# Altium PCB ADD-ON.PcbDoc
Units mil, origin at the board's own origin, x right, y up, seen from the top; angles counter-clockwise.
Board outline 1605 x 1090 mil, 2 copper layers (Top Layer, Bottom Layer); 33 components, 59 nets, 200 pads, 32 vias.
Unrouted connection lines stored in the file: 15.
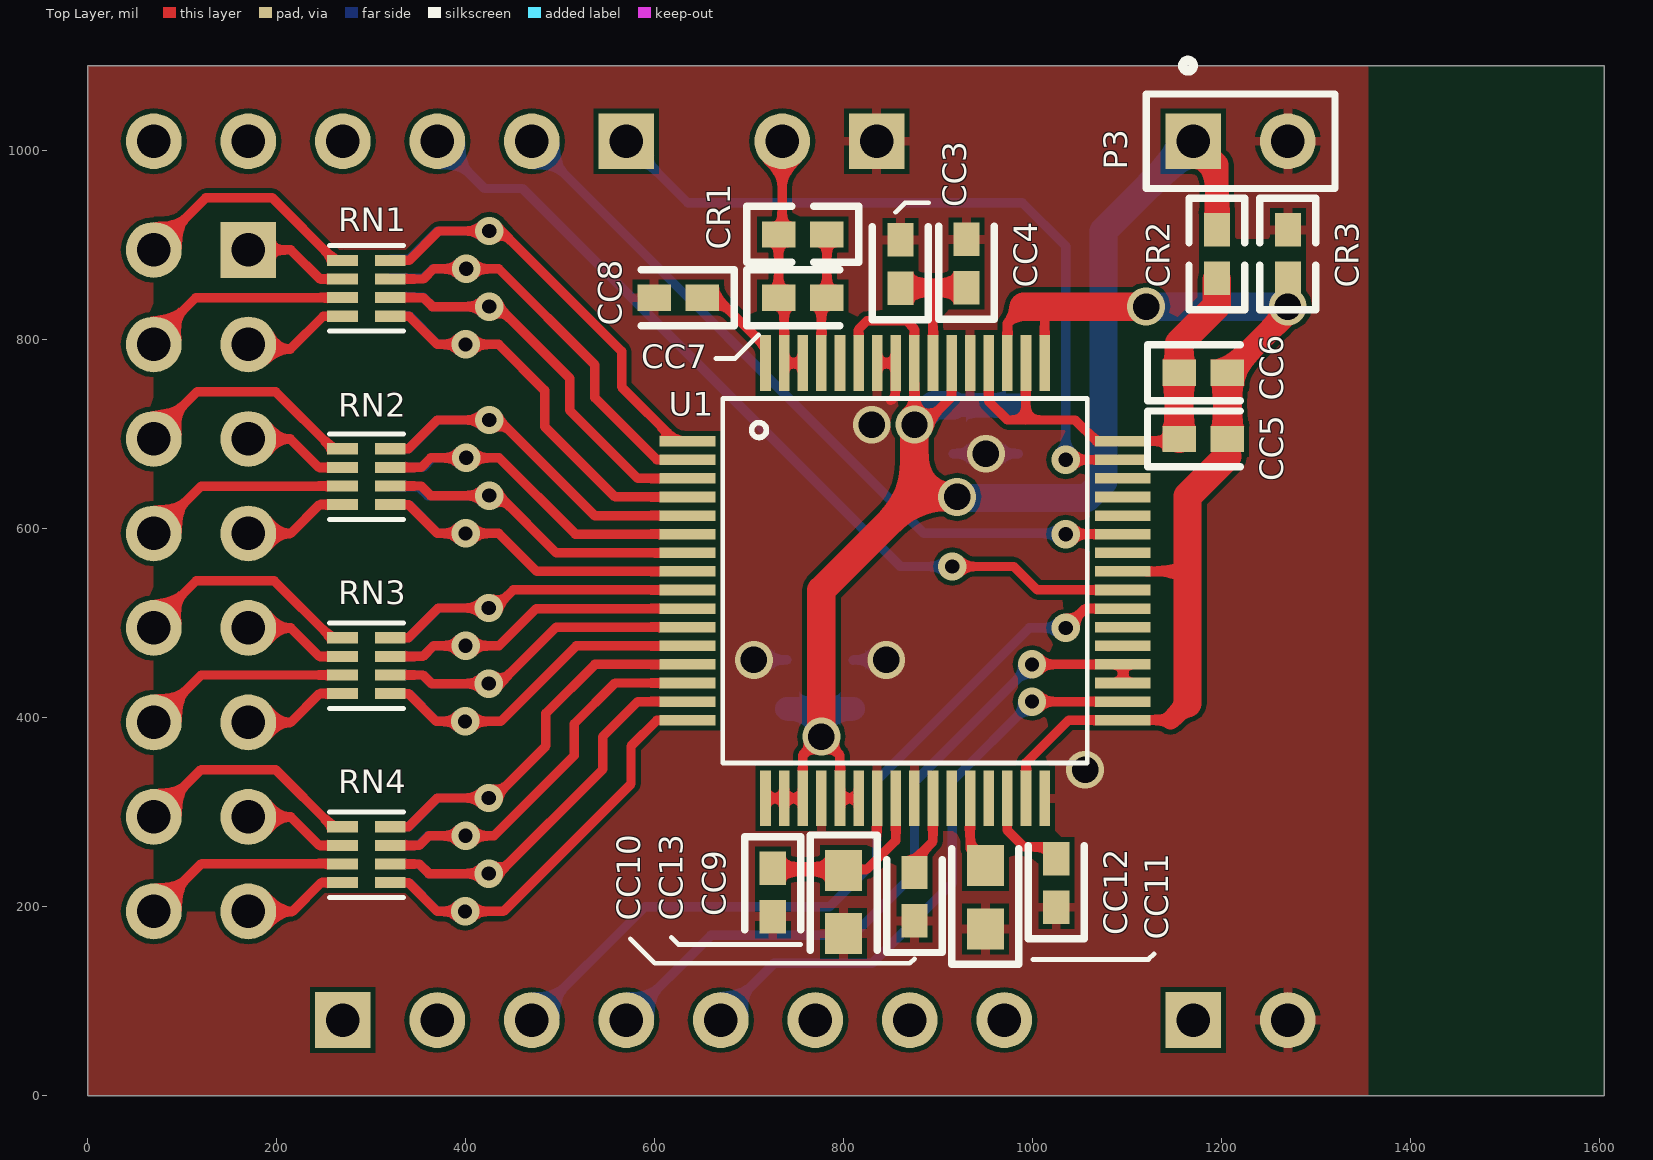
[diagram p0: Top Layer view]
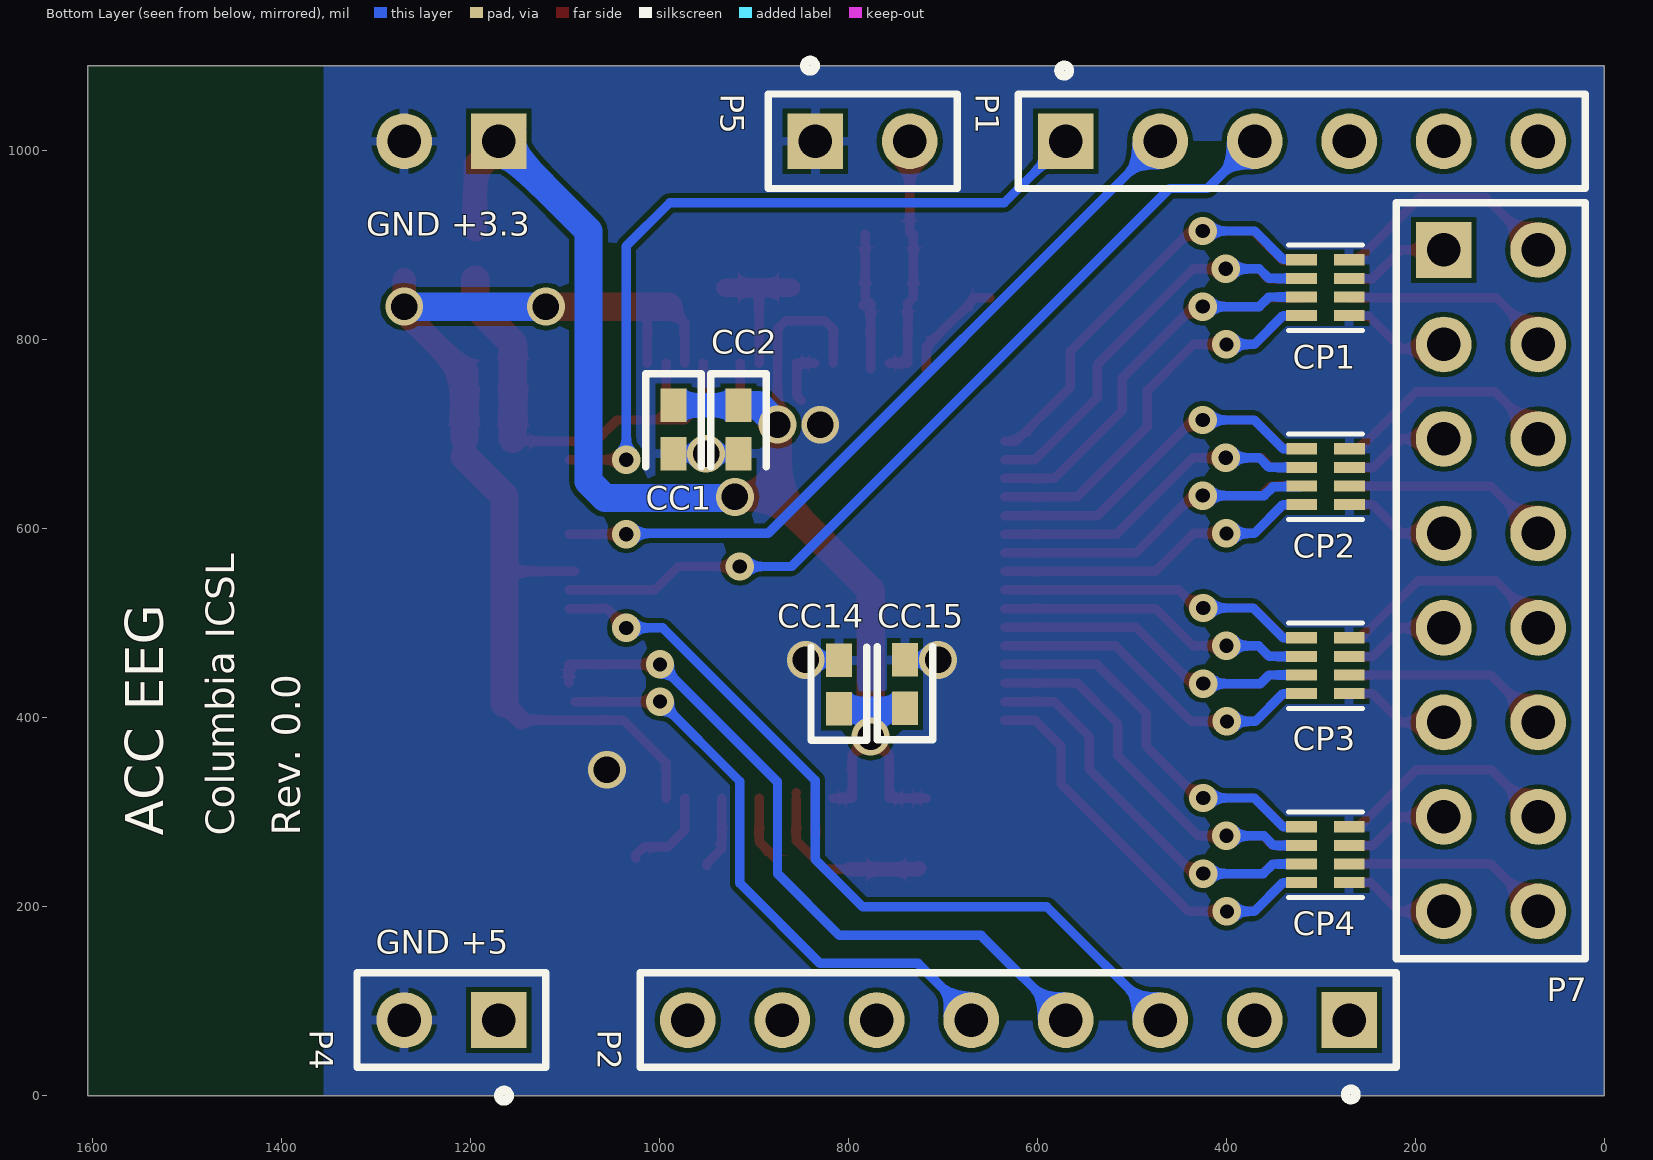
[diagram p1: Bottom Layer view, seen from below]
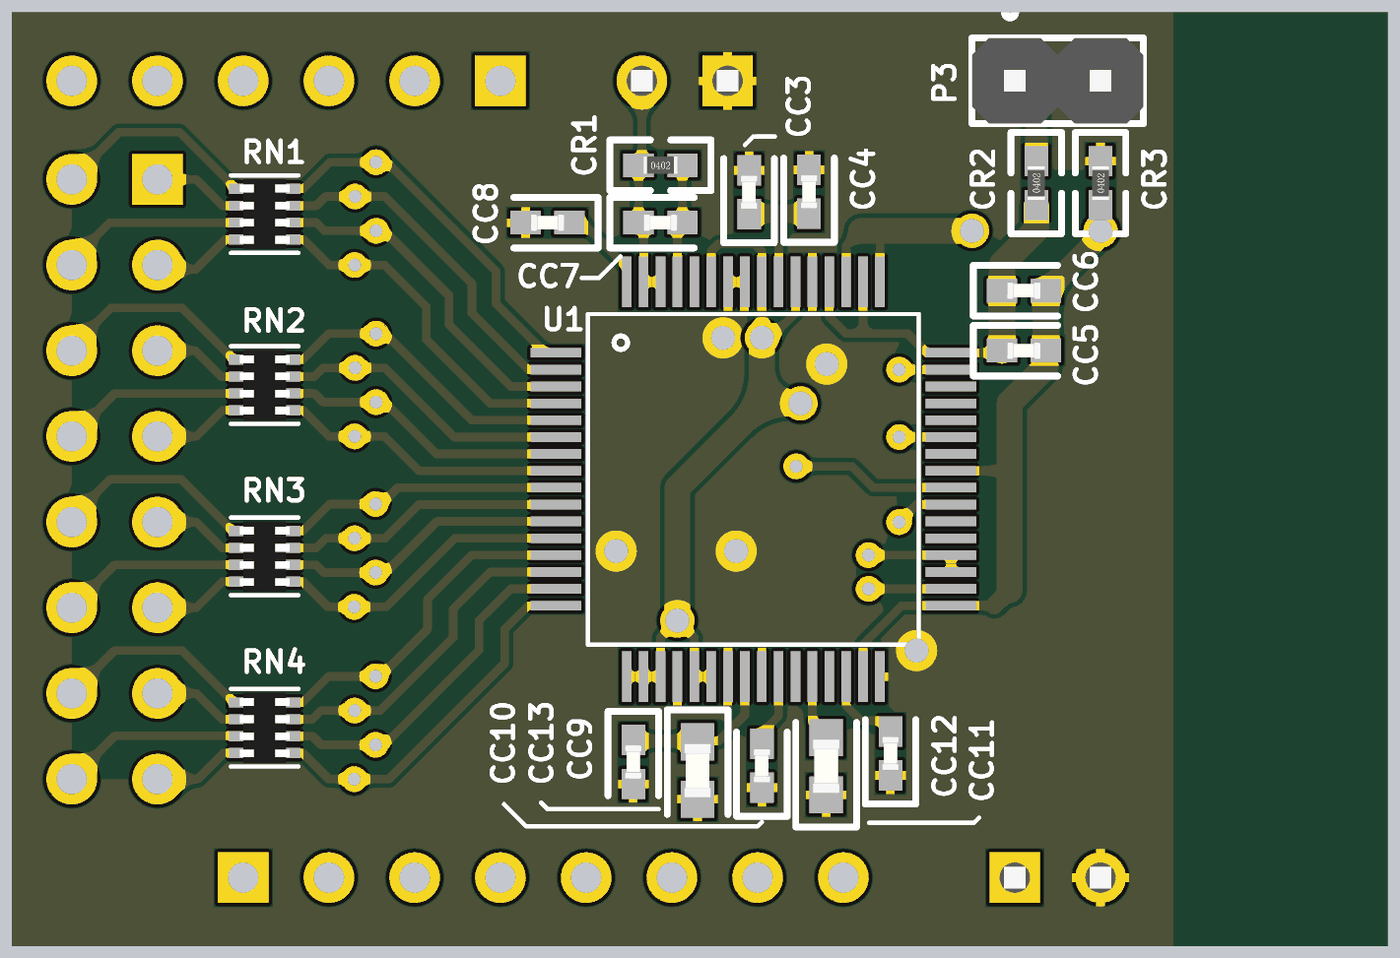
[diagram p2: 3D render of the assembled board from above, using the file's embedded part models]
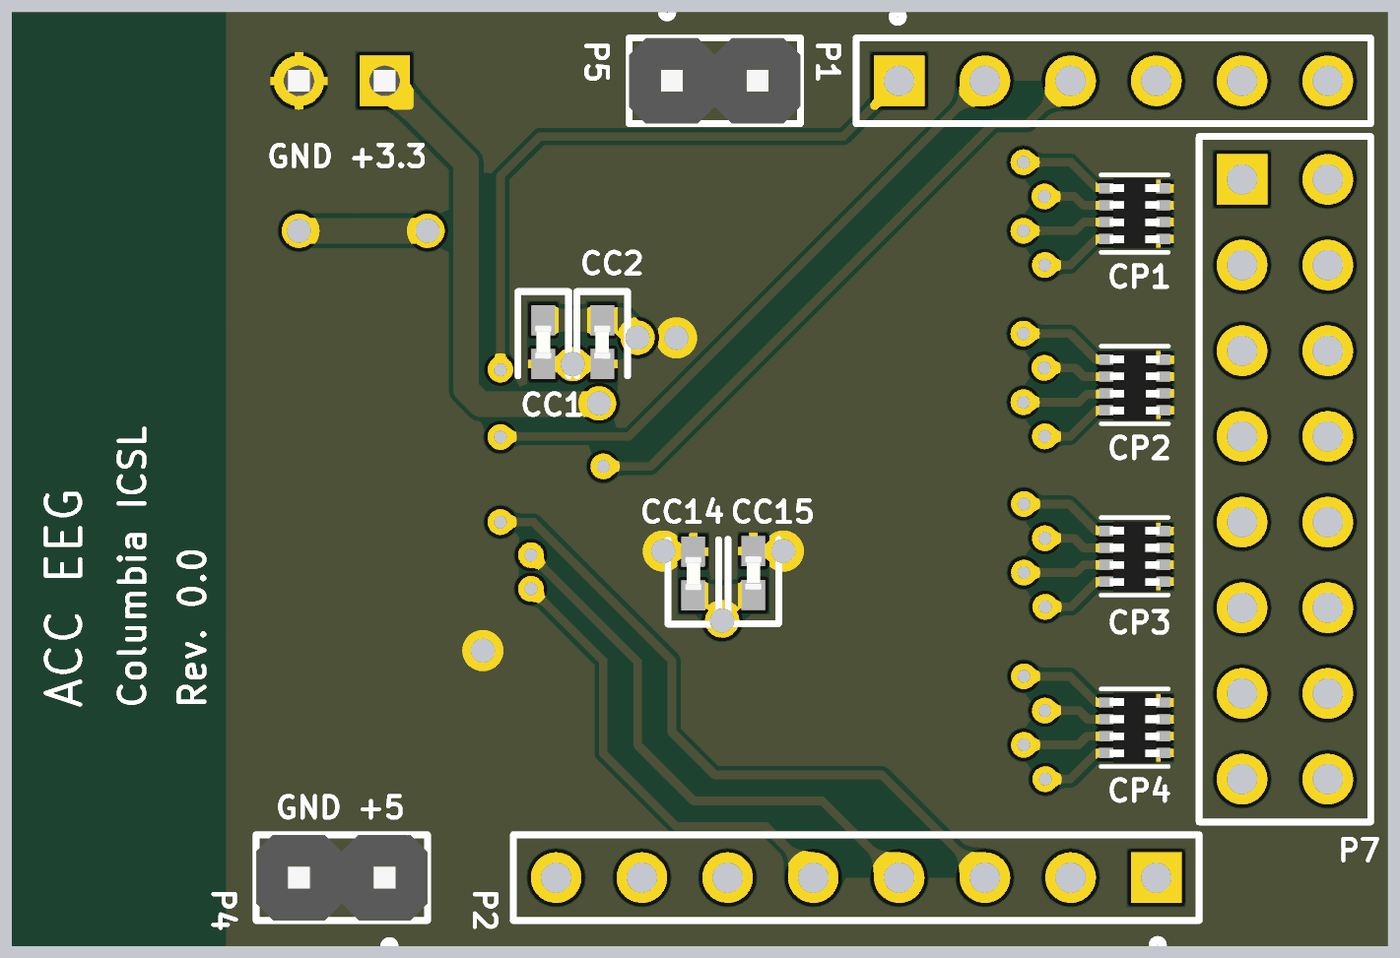
[diagram p3: 3D render of the assembled board from below, using the file's embedded part models]

## Layer stack, top to bottom
Top Solder: solder mask 0.4, Solder Resist, Dk 3.5
Top Layer: signal copper 1.4
Dielectric 1: dielectric 12.6, FR-4, Dk 4.8
Bottom Layer: signal copper 1.4
Bottom Solder: solder mask 0.4, Solder Resist, Dk 3.5

## Board outline
0,0 1605,0 1605,1090 0,1090

## Design rules (kind name [scope] priority, off if disabled: settings)
Clearance [All] p1: gap=5 ignorepadtopadclearanceinfootprint=FALSE
PolygonConnect [All] p1: connectstyle=Relief reliefconductorwidth=10 reliefentries=4 polygonreliefangle="90 Angle" airgapwidth=5
RoutingVias [All] p1: holewidth=2228 width=50 viastyle="Through Hole" minholewidth=15 minwidth=30 maxholewidth=30 maxwidth=60
SolderMaskExpansion [All] p1: expansion=4
Width [All] p1: maxlimit=30 minlimit=10 preferedwidth=15
30 further rules are at their usual default settings.

## Components (designator, comment, footprint, x,y, rotation, side; value= is the part's Value field where it differs from the comment)
CC1 "Cap Chip 0402" CC1005-0402 985,705 r270 bottom value=1uF
CC2 "Cap Chip 0402" CC1005-0402 916.22,705 r270 bottom value=0.1uF
CC3 "Cap Chip 0402" CC1005-0402 860,880 r90 top value=0.1uF
CC4 "Cap Chip 0402" CC1005-0402 930,880.59 r90 top value=1uF
CC5 "Cap Chip 0402" CC1005-0402 1180.59,695 r0 top value=0.1uF
CC6 "Cap Chip 0402" CC1005-0402 1180.59,765 r0 top value=1uF
CC7 "Cap Chip 0402" CC1005-0402 756.73,844.41 r0 top value=1.5nF
CC8 "Cap Chip 0402" CC1005-0402 625,844.41 r180 top value=1nF
CC9 "Cap Chip 0402" CC1005-0402 725,215 r270 top value=0.1uF
CC10 "Cap Chip 0402" CC1005-0402 875,210.59 r90 top value=1uF
CC11 "Cap Chip 0603" CC1608-0603 950,210 r90 top value=22uF
CC12 "Cap Chip 0402" CC1005-0402 1025,225 r90 top value=1uF
CC13 "Cap Chip 0603" CC1608-0603 800,205 r270 top value=10uF
CC14 "Cap Chip 0402" CC1005-0402 810,435 r90 bottom value=1uF
CC15 "Cap Chip 0402" CC1005-0402 740,435.59 r90 bottom value=0.1uF
CP1 "CAP-PACK" CAP-PACK-4 295,855 r180 bottom
CP2 "CAP-PACK" CAP-PACK-4 294.8,655 r180 bottom
CP3 "CAP-PACK" CAP-PACK-4 295,455 r180 bottom
CP4 "CAP-PACK" CAP-PACK-4 295,255 r180 bottom
CR1 "Resistor Chip 0402" CR1005-0402 756.73,911.5 r0 top value=1M
CR2 "Resistor Chip 0402" CR1005-0402 1195,890.59 r90 top value=0K
CR3 "Resistor Chip 0402" CR1005-0402 1270,890.59 r90 top value=0K
P1 "Header 6" HDR1X6 570,1010 r180 bottom
P2 "Header 8" HDR1X8 270,80 r0 bottom
P3 "Header 2" HDR1X2 1170,1010 r0 top
P4 "Header 2" HDR1X2 1170,80 r0 bottom
P5 "Header 2" HDR1X2 835,1010 r180 bottom
P7 "Header 8X2" HDR2X8 170,895 r270 bottom
RN1 "RESNET 4 x 100R" RESNET-1005X4 295,854.41 r270 top
RN2 "RESNET 4 x 100R" RESNET-1005X4 295,655 r270 top
RN3 "RESNET 4 x 100R" RESNET-1005X4 295,455 r270 top
RN4 "RESNET 4 x 100R" RESNET-1005X4 295,255 r270 top
U1 "ADS1298" ADS1298 865.02,545 r0 top

## Footprints (in the part's own frame and the unit in brackets; to place one, negate y for a bottom-side part, rotate by r counter-clockwise, add the part's x,y. Pads: shape width x height; smd on the part's side, far side on the other; paste and mask are expansions set on the pad)
ADS1298 [mm]
  rect 1.5x0.285 smd: 1(-5.85,3.75) 2(-5.85,3.25) 3(-5.85,2.75) 4(-5.85,2.25) 5(-5.85,1.75) 6(-5.85,1.25) 7(-5.85,0.75) 8(-5.85,0.25) 9(-5.85,-0.25) 10(-5.85,-0.75) 11(-5.85,-1.25) 12(-5.85,-1.75) 13(-5.85,-2.25) 14(-5.85,-2.75) 15(-5.85,-3.25) 16(-5.85,-3.75) 33(5.85,-3.75) 34(5.85,-3.25) 35(5.85,-2.75) 36(5.85,-2.25) 37(5.85,-1.75) 38(5.85,-1.25) 39(5.85,-0.75) 40(5.85,-0.25) 41(5.85,0.25) 42(5.85,0.75) 43(5.85,1.25) 44(5.85,1.75) 45(5.85,2.25) 46(5.85,2.75) 47(5.85,3.25) 48(5.85,3.75)
  rect 0.285x1.5 smd: 17(-3.75,-5.85) 18(-3.25,-5.85) 19(-2.75,-5.85) 20(-2.25,-5.85) 21(-1.75,-5.85) 22(-1.25,-5.85) 23(-0.75,-5.85) 24(-0.25,-5.85) 25(0.25,-5.85) 26(0.75,-5.85) 27(1.25,-5.85) 28(1.75,-5.85) 29(2.25,-5.85) 30(2.75,-5.85) 31(3.25,-5.85) 32(3.75,-5.85) 49(3.75,5.85) 50(3.25,5.85) 51(2.75,5.85) 52(2.25,5.85) 53(1.75,5.85) 54(1.25,5.85) 55(0.75,5.85) 56(0.25,5.85) 57(-0.25,5.85) 58(-0.75,5.85) 59(-1.25,5.85) 60(-1.75,5.85) 61(-2.25,5.85) 62(-2.75,5.85) 63(-3.25,5.85) 64(-3.75,5.85)
  silkscreen extent -4.9,-4.9 4.9,4.9
CAP-PACK-4 [mm]
  rect 0.83x0.3 smd: 1(0.635,-0.75) 2(0.635,-0.25) 3(0.635,0.25) 4(0.635,0.75) 5(-0.645,0.75) 6(-0.645,0.25) 7(-0.645,-0.25) 8(-0.645,-0.75)
  silkscreen extent -1.01,-1.15 0.99,1.15, body extent -0.74,-1.04 0.73,1.04, height 0.5
CC1005-0402 [mm]
  rect 0.9x0.7 smd: 1(-0.65,0) 2(0.65,0)
  silkscreen extent -1.5,-0.75 1,0.75, body extent -0.5,-0.25 0.5,0.25, height 0.3
CC1608-0603 [mm]
  rect 1.1x1 smd: 1(-0.85,0) 2(0.85,0)
  silkscreen extent -1.8,-0.9 1.3,0.9, body extent -0.8,-0.4 0.8,0.4, height 0.3
CR1005-0402 [mm]
  rect 0.9x0.7 smd: 1(-0.65,0) 2(0.65,0)
  silkscreen extent -1.5,-0.75 1.5,0.75, body extent -0.5,-0.25 0.5,0.25, height 0.35
HDR1X2 [mm] "Connector; Header; 2 Position"
  rect 1.5x1.5 hole 0.9: 1(0,0)
  round 1.5 hole 0.9: 2(2.54,0)
  silkscreen extent -1.27,-1.27 3.81,2.17, body extent -1.27,-1.27 3.81,1.27, height 8.54
HDR1X6 [mm] "Connector; Header; 6 Position"
  rect 1.5x1.5 hole 0.9: 1(0,0)
  round 1.5 hole 0.9: 2(2.54,0) 3(5.08,0) 4(7.62,0) 5(10.16,0) 6(12.7,0)
  silkscreen extent -1.27,-1.27 13.97,2.04, body extent -1.27,-1.27 13.97,1.27, height 8.54
HDR1X8 [mm] "Connector; Header; 8 Position"
  rect 1.5x1.5 hole 0.9: 1(0,0)
  round 1.5 hole 0.9: 2(2.54,0) 3(5.08,0) 4(7.62,0) 5(10.16,0) 6(12.7,0) 7(15.24,0) 8(17.78,0)
  silkscreen extent -1.27,-1.27 19.05,2.14, body extent -1.27,-1.27 19.05,1.27, height 8.54
HDR2X8 [mm] "Connector; Header; 8x2 Position"
  rect 1.5x1.5 hole 0.9: 1(0,0)
  round 1.5 hole 0.9: 2(0,2.54) 3(2.54,0) 4(2.54,2.54) 5(5.08,0) 6(5.08,2.54) 7(7.62,0) 8(7.62,2.54) 9(10.16,0) 10(10.16,2.54) 11(12.7,0) 12(12.7,2.54) 13(15.24,0) 14(15.24,2.54) 15(17.78,0) 16(17.78,2.54)
  silkscreen extent -1.27,-1.27 19.05,3.81, body extent -1.27,-1.27 19.05,3.81, height 8.54
RESNET-1005X4 [mm]
  rect 0.3x0.83 smd: 1(-0.75,-0.64) 2(-0.25,-0.64) 3(0.25,-0.64) 4(0.75,-0.64) 5(0.75,0.64) 6(0.25,0.64) 7(-0.25,0.64) 8(-0.75,0.64)
  silkscreen extent -1.15,-1 1.15,1, body extent -1.04,-0.74 1.04,0.74, height 0.5

## Part data
CC1 CC2 CC3 CC4 CC5 CC6 CC7 CC8 CC9 CC10 CC11 CC12 CC13 CC14 CC15: "Polarized Capacitor (Radial)", Published=8-Jun-2000, Publisher="Altium Limited", Revision="July-2002: Re-released for DXP Platform."
CR1 CR2 CR3: "Resistor", Published=8-Jun-2000, Publisher="Altium Limited", Revision="July-2002: Re-released for DXP Platform."
P1: "Header, 6-Pin", LatestRevisionDate=17-Jul-2002, LatestRevisionNote="Re-released for DXP Platform.", Publisher="Altium Limited"
P2: "Header, 8-Pin", LatestRevisionDate=17-Jul-2002, LatestRevisionNote="Re-released for DXP Platform.", Publisher="Altium Limited"
P3 P4 P5: "Header, 2-Pin", LatestRevisionDate=17-Jul-2002, LatestRevisionNote="Re-released for DXP Platform.", Publisher="Altium Limited"
P7: "Header, 8-Pin, Dual row", LatestRevisionDate=17-Jul-2002, LatestRevisionNote="Re-released for DXP Platform.", Publisher="Altium Limited"
RN1 RN2 RN3 RN4: library part "Res Pack SMT4", "Resistor Network, Isolated, 4 x 100R, 5%, SMD 0402 x 4", Power Rating="63 mW", Resistance=100, Tolerance="5 %", Category=Resistor-Network, Mounting Technology="Surface Mount", Status=Unreleased

## Via types
v1: diameter 30, hole 15, Top Layer to Bottom Layer, 22 vias
v2: diameter 40, hole 28, Top Layer to Bottom Layer, 10 vias

## Nets (pads, with @x,y where several pads share a name; then routed paths per layer and width w, separated by ;. In a path a pad name is that pad's centre, name@x,y a point inside that pad or via, vN(x,y) a via of type N, cw(c..) or ccw(c..) an arc to the next point about the centre after c; other vN are vias at no path point)
+3.3: CC1.1 CC2.1 CC14.1 CC15.1 CR2.2 P3.1 U1.17 U1.18 U1.19 U1.21 U1.22 U1.54 U1.56 U1.59 | length 1802.6
  Top Layer w10: U1.17 U1.18 U1.19 756.73,360.31 v2(776.42,380) 796.1,360.32 U1.21 U1.22 ; U1.59 815.79,811.05 824.74,820 866.29,820 874.84,811.45 874.84,775.47 875,775.31 v2(875,710.16) ; v2@887.58,712.58 914.21,739.21 U1.54
  Top Layer w25: P3.1 1195,985 CR2.2
  Top Layer w30: v2(776.42,380) 776.42,535.15 874.85,633.58 ; v2(875,710.16) 874.85,710.01 874.85,633.58 ; v2(920,633.58) 874.85,633.58 ; P3.1@1160,1000 P3.1
  Bottom Layer w25: CC15.1@740,409.41 775,409.41 ; v2@775,380 775,409.41 ; CC14.1 775,409.41 ; CC2.1 CC1.1
  Bottom Layer w30: v2(875,710.16) 895.43,730.59 CC2.1 ; v2@915,633.58 916.08,632.5 1057.5,632.5 1075,650 1075,915 P3.1
+5: P4.1
GND: CC1.2 CC2.2 CC3.2 CC4.2 CC8.2 CC9.2 CC10.1 CC11.1 CC12.1 CC13.2 CC14.2 CC15.2 CP1.1 CP1.2 CP1.3 CP1.4 CP2.1 CP2.2 CP2.3 CP2.4 CP3.1 CP3.2 CP3.3 CP3.4 CP4.1 CP4.2 CP4.3 CP4.4 CR3.2 P3.2 P4.2 P5.1 U1.20 U1.23 U1.25 U1.32 U1.53 U1.57 U1.58 | length 241.3
  Top Layer w10: 835,274.71 835,314.2 U1.23 ; U1.23@835,320.12 U1.23@835.47,320.59 ; U1.58 U1.57 854.55,774.7 854.55,740.18 850,735.63
  Bottom Layer w10: v2(705,461.18) CC15.2 ; CC14.2 810.59,461.18 v2(845,461.18) ; CC2.2 v2(950.61,679.41) CC1.2
  other v2: 1055.47,345 829.69,710
NetCC3_1: CC3.1 CC4.1 U1.55 | length 149.1
  Top Layer w10: U1.55 894.53,855
  Top Layer w20: CC3.1@860.59,855 894.53,855 CC4.1
NetCC5_1: CC5.1 CC6.1 CR2.1 U1.48 U1.50 U1.52 | length 504.8
  Top Layer w10: U1.52 953.58,734.69 973.27,715 992.95,715 ; U1.50 992.95,715 ; CC5.1@1155,692.64 1067.36,692.64 1045,715 992.95,715
  Top Layer w30: CC5.1 CC6.1 1155,796.34 1195,836.34 CR2.1@1195,863.5
NetCC5_2: CC5.2 CC6.2 CR3.1 U1.31 U1.33 U1.41 U1.49 U1.51 | length 1204.9
  Top Layer w10: U1.51 973.27,817.59 990.68,835 ; U1.31 992.95,352.32 1037.99,397.36 1145.85,397.36 ; U1.49 1012.64,832.64 ; U1.41@1089.41,554.84 1163.95,554.84
  Top Layer w20: 1145.85,397.36 1163.95,415.46 ; 1206.18,676.65 CC5.2
  Top Layer w25: CC6.2 1270,828.82 v2(1270,835) CR3.1@1270,863.5
  Top Layer w30: 990.68,835 v2(1120,835) ; 1163.95,415.46 1163.95,554.84 1163.95,634.42 1206.18,676.65 ; CC5.2 CC6.2
  Bottom Layer w30: v2(1120,835) v2(1270,835)
NetCC7_1: CC7.1 CR1.1 P5.2 U1.62 U1.63 | length 257.4
  Top Layer w10: CR1.1 CC7.1 737.05,838.5 737.05,775.31 U1.62 ; CR1.1@733.5,911.5 735,913 P5.2
NetCC7_2: CC7.2 CR1.2 U1.61 | length 144.5
  Top Layer w10: U1.61@776.42,769.41 776.42,838.51 CC7.2 CR1.2
NetCC8_1: CC8.1 U1.64 | length 111.4
  Top Layer w10: CC8.1 665.59,844.41 717.36,792.64 U1.64@717.36,769.41
NetCC9_1: CC9.1 CC13.1 U1.24 | length 187.4
  Top Layer w10: CC13.1 801.06,239.53 824.69,239.53 855.16,270 U1.24 ; U1.24@855.08,320.51 U1.24@855.16,320.59
  Top Layer w15: CC9.1 726.06,239.53 CC13.1@798.94,239.53
NetCC10_2: CC10.2 U1.26 | length 86.6
  Top Layer w10: CC10.2 875,249.56 894.53,269.09 U1.26
NetCC11_2: CC11.2 U1.28 | length 77.9
  Top Layer w10: U1.28 933.9,261.53 950,245.43 CC11.2
NetCC12_2: CC12.2 U1.30 | length 99.9
  Top Layer w10: U1.30 973.27,280.74 990.7,263.31 1016.22,263.31 1025,254.53 CC12.2@1025,251.18
NetCP1_5: CP1.5 RN1.8 U1.1 | length 558.8
  Top Layer w10: RN1.8 340.28,883.94 371.34,915 v1(425,915) 437.72,915 565,787.72 565,750 622.36,692.64 U1.1
  Bottom Layer w10: CP1.5 320.86,885 340,885 370,915 v1(425,915)
NetCP1_6: CP1.6 RN1.7 U1.2 | length 507.4
  Top Layer w10: RN1.7 355.35,864.25 366.1,875 v1(400.55,875) 435,875 536.73,773.27 536.73,738.58 602.36,672.95 U1.2@634.72,672.95
  Bottom Layer w10: CP1.6 355,864.84 365.15,875 v1(400.55,875)
NetCP1_7: CP1.7 RN1.6 U1.3 | length 532.8
  Top Layer w10: RN1.6 355.19,844.57 364.76,835 v1(425,835) 434.33,835 510,759.33 510,725.32 582.05,653.27 U1.3
  Bottom Layer w10: CP1.7 354.99,845.16 365.15,835 424.33,835 425,834.33 v1@435,834.33
NetCP1_8: CP1.8 RN1.5 U1.4 | length 508.4
  Top Layer w10: RN1.5 340.12,824.88 370,795 v1(400,795) 435,795 483.59,746.41 483.59,708.14 558.15,633.58 U1.4
  Bottom Layer w10: CP1.8 340,825.47 370.47,795 v1(400,795)
NetCP2_5: CP2.5 RN2.8 U1.5 | length 486.4
  Top Layer w10: RN2.8 339.53,684.53 370,715 v1(425,715) 435.31,715 536.41,613.9 U1.5
  Bottom Layer w10: CP2.5 340,684.53 370.47,715 v1(425,715)
NetCP2_6: CP2.6 RN2.7 U1.6 | length 436.2
  Top Layer w10: RN2.7 352.99,664.84 363.15,675 400,675 435.31,675 516.1,594.21 U1.6
  Bottom Layer w10: CP2.6 354.84,664.84 365,675 v1@400,675
  other v1: 400.55,675
NetCP2_7: CP2.7 RN2.6 U1.7 | length 452.8
  Top Layer w10: RN2.6 352.99,645.16 363.15,635 v1(425,635) 435.2,635 495.67,574.53 U1.7
  Bottom Layer w10: CP2.7 321.1,644.25 350.75,644.25 360,635 v1(425,635)
NetCP2_8: CP2.8 RN2.5 U1.8 | length 436.2
  Top Layer w10: RN2.5 339.65,625.47 370.12,595 v1(400,595) 435,595 475.16,554.84 U1.8
  Bottom Layer w10: CP2.8 340,625.47 370.47,595 v1(400,595)
NetCP3_5: CP3.5 RN3.8 U1.9 | length 452.6
  Top Layer w10: RN3.8 339.53,484.53 371.1,516.1 v1(424.45,516.1) 431.3,516.1 450.36,535.16 U1.9@634.72,535.16
  Bottom Layer w10: CP3.5 340,484.53 371.57,516.1 v1(424.45,516.1)
NetCP3_6: CP3.6 RN3.7 U1.10 | length 419.8
  Top Layer w10: RN3.7 354.84,464.84 366.1,476.1 v1(400,476.1) 435.31,476.1 474.68,515.47 U1.10
  Bottom Layer w10: CP3.6 354.69,464.84 365.94,476.1 v1(400,476.1)
NetCP3_7: CP3.7 RN3.6 U1.11 | length 450.8
  Top Layer w10: RN3.6 354.84,445.16 363.9,436.1 v1(424.45,436.1) 436.1,436.1 495.79,495.79 U1.11
  Bottom Layer w10: CP3.7 354.84,445.16 363.9,436.1 v1(424.45,436.1)
NetCP3_8: CP3.8 RN3.5 U1.12 | length 451
  Top Layer w10: RN3.5 339.53,425.47 368.9,396.1 v1(399.45,396.1) 437.2,396.1 517.2,476.1 U1.12
  Bottom Layer w10: CP3.8 340,425.47 369.37,396.1 v1(399.45,396.1)
NetCP4_5: CP4.5 RN4.8 U1.13 | length 522.7
  Top Layer w10: RN4.8 339.53,284.53 370,315 v1(424.45,315) 429.93,315 485,370.07 485,404.69 536.73,456.42 U1.13
  Bottom Layer w10: CP4.5 340,284.53 370.47,315 v1(424.45,315)
NetCP4_6: CP4.6 RN4.7 U1.14 | length 489.2
  Top Layer w10: RN4.7 350.94,264.84 361.1,275 v1(400,275) 430,275 515,360 515,393.58 558.15,436.73 U1.14
  Bottom Layer w10: CP4.6 350,264.84 360.15,275 v1(400,275)
NetCP4_7: CP4.7 RN4.6 U1.15 | length 522.8
  Top Layer w10: RN4.6 350.94,245.16 361.1,235 v1(424.45,235) ; v1@425,235 434.77,235 545,345.23 545,380 582.05,417.05 U1.15
  Bottom Layer w10: CP4.7 350.75,245.16 360.91,235 v1(424.45,235) v1@425,235
NetCP4_8: CP4.8 RN4.5 U1.16 | length 526.7
  Top Layer w10: RN4.5 339.53,225.47 370,195 v1(399.45,195) 440,195 575,330 575,370 602.36,397.36 U1.16@634.72,397.36
  Bottom Layer w10: CP4.8 340,225.47 370.47,195 v1(399.45,195) ; v1@399.53,190.47 v1@400,190
NetP1_1: P1.1 U1.47 | length 797.4
  Top Layer w10: v1(1035,672.95) U1.47@1095.32,672.95
  Bottom Layer w10: P1.1 635,945 989.01,945 1035,899.01 v1(1035,672.95)
NetP1_2: P1.2 U1.43 | length 797.2
  Top Layer w10: v1(1035,594.21) U1.43
  Bottom Layer w10: P1.2 885,595 v1@1035,595
NetP1_3: P1.3 U1.40 | length 922
  Top Layer w10: v1(915,560) 980,560 1004.84,535.16 U1.40@1095.32,535.16
  Bottom Layer w10: P1.3 420,960 460,960 860,560 v1(915,560)
NetP1_4: P1.4
NetP1_5: P1.5
NetP1_6: P1.6
NetP2_1: P2.1
NetP2_2: P2.2
NetP2_3: P2.3 U1.39 | length 854.7
  Top Layer w10: v1(1035,495) 1055.47,515.47 U1.39
  Bottom Layer w10: P2.3 590,200 785,200 835,250 835,333.62 996.38,495 v1(1035,495)
NetP2_4: P2.4 U1.35 U1.36 | length 758.1
  Top Layer w10: v1(999.4,456.42) 1095.66,456.42 U1.35@1095.66,436.72
  Bottom Layer w10: P2.4 659.61,169.61 809.61,169.61 875,235 875,332.02 v1(999.4,456.42)
NetP2_5: P2.5 U1.34 | length 624.3
  Top Layer w10: v1(999.4,417.05) U1.34@1089.41,417.05
  Bottom Layer w10: P2.5 670,83.83 726.17,140 830,140 915,225 915,332.65 v1(999.4,417.05)
NetP2_6: P2.6
NetP2_7: P2.7
NetP2_8: P2.8
NetP7_1: P7.1 RN1.2 | length 112.5
  Top Layer w10: P7.1 215,895 245.75,864.25 RN1.2
NetP7_2: P7.2 RN1.1 | length 249.9
  Top Layer w10: P7.2 125,950 195.47,950 261.54,883.94 RN1.1
NetP7_3: P7.3 RN1.4 | length 116.3
  Top Layer w10: P7.3 175,790 214.41,790 249.29,824.88 RN1.4
NetP7_4: P7.4 RN1.3 | length 223.2
  Top Layer w10: P7.4 70,800 114.41,844.41 RN1.3@269.8,844.41
NetP7_5: P7.5 RN2.2 | length 112.3
  Top Layer w10: P7.5 214.41,695 244.57,664.84 RN2.2
NetP7_6: P7.6 RN2.1 | length 248
  Top Layer w10: P7.6 70,699.21 115.79,745 198.9,745 259.37,684.53 RN2.1
NetP7_7: P7.7 RN2.4 | length 112.4
  Top Layer w10: P7.7 215,595 245.47,625.47 RN2.4
NetP7_8: P7.8 RN2.3 | length 220.5
  Top Layer w10: P7.8 120,645 RN2.3@269.8,645
NetP7_9: P7.9 RN3.2 | length 112.3
  Top Layer w10: P7.9 215,495 245.16,464.84 RN3.2
NetP7_10: P7.10 RN3.1 | length 248.5
  Top Layer w10: P7.10 70,500 115,545 197.28,545 257.76,484.53 RN3.1
NetP7_11: P7.11 RN3.4 | length 112.4
  Top Layer w10: P7.11 215,395 245.47,425.47 RN3.4
NetP7_12: P7.12 RN3.3 | length 220.6
  Top Layer w10: P7.12 120.16,445.16 RN3.3
NetP7_13: P7.13 RN4.2 | length 112.3
  Top Layer w10: P7.13 215,295 245.16,264.84 RN4.2
NetP7_14: P7.14 RN4.1 | length 245.6
  Top Layer w10: P7.14 120,345 198.9,345 259.37,284.53 RN4.1
NetP7_15: P7.15 RN4.4 | length 112.4
  Top Layer w10: P7.15 216.81,195 247.28,225.47 RN4.4
NetP7_16: P7.16 RN4.3 | length 220.8
  Top Layer w10: P7.16 120.59,245.59 RN4.3@269.8,245.59
pads on no net: U1.27 U1.29 U1.37 U1.38 U1.42 U1.44 U1.45 U1.46 U1.60

## Polygon pours and split planes (outlines as drawn)
GND on Bottom Layer "Bottom Layer-GND" (solid, remove dead copper, pour order 16): 0,1090 1355,1090 1355,0 0,0
GND on Top Layer "Top Layer-GND" (solid, remove dead copper, pour order 24): 0,1090 1355,1090 1355,0 0,0

## Other copper
Top Layer:
  pour cut-out: 1214.19,906.18 1251.64,906.18 1251.64,898.94 1214.19,898.94
  pour cut-out: 70,895 170,895 170,195 70,195
  pour cut-out: 334.53,929.53
  pour cut-out: 152.59,945
  region: 10,1300
  pour cut-out: -2810,-145
Bottom Layer:
  pour cut-out: 404.83,1010 435.17,1010 439.84,1005.33 439.84,992.59 401.83,992.59 400.65,993.77
  pour cut-out: 604.83,80 635.17,80 635.17,87.83 636.54,96.23 629.14,96.23 600.65,96.23
  pour cut-out: 504.83,80 535.17,80 539.84,84.67 539.84,97.41 501.83,97.41 500.65,96.23

## Silkscreen, mask and mechanical layers (free items; w line width, h text height)
Top Overlay:
  lines w5: 574.06,165.94 600,140 870,140 875,145 ; 617.5,167.5 625,160 754.53,160 ; 665,780 685,780 710,805 ; 855,935 865,945 890,945 ; 1000,144.13 1122.6,144.13 1128.46,150
Bottom Overlay:
  text "GND +3.3" at 1310,910 h25
  text "Rev. 0.0" at 1380,275 h30 r270
  text "Columbia ICSL" at 1450,275 h30 r270
  text "ACC EEG" at 1525,275 h40 r270
  text "GND +5" at 1300,150 h25
Mechanical 1:
  the board outline again, w5